# Altium PCB V1.PcbDoc
Units mm, origin at the board's own origin, x right, y up, seen from the top; angles counter-clockwise.
Board outline 25.93 x 33.8 mm, 2 copper layers (Top Layer, Bottom Layer); 9 components, 8 nets, 33 pads, 9 vias.
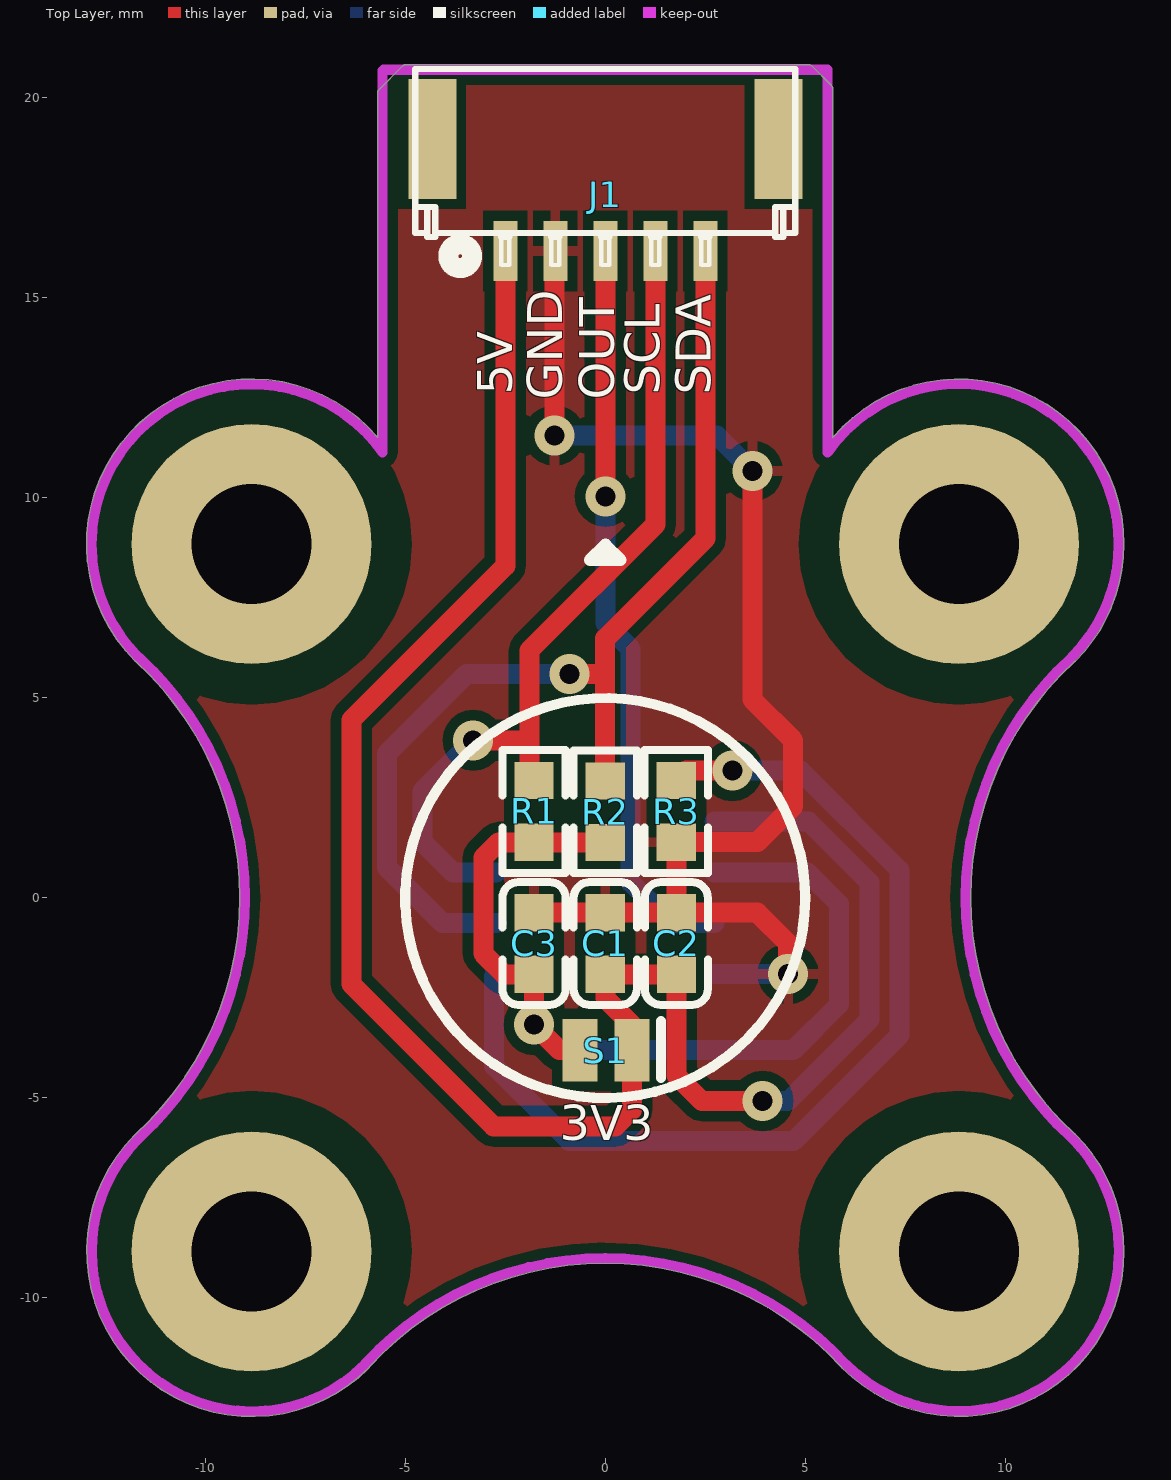
[diagram p0: Top Layer view]
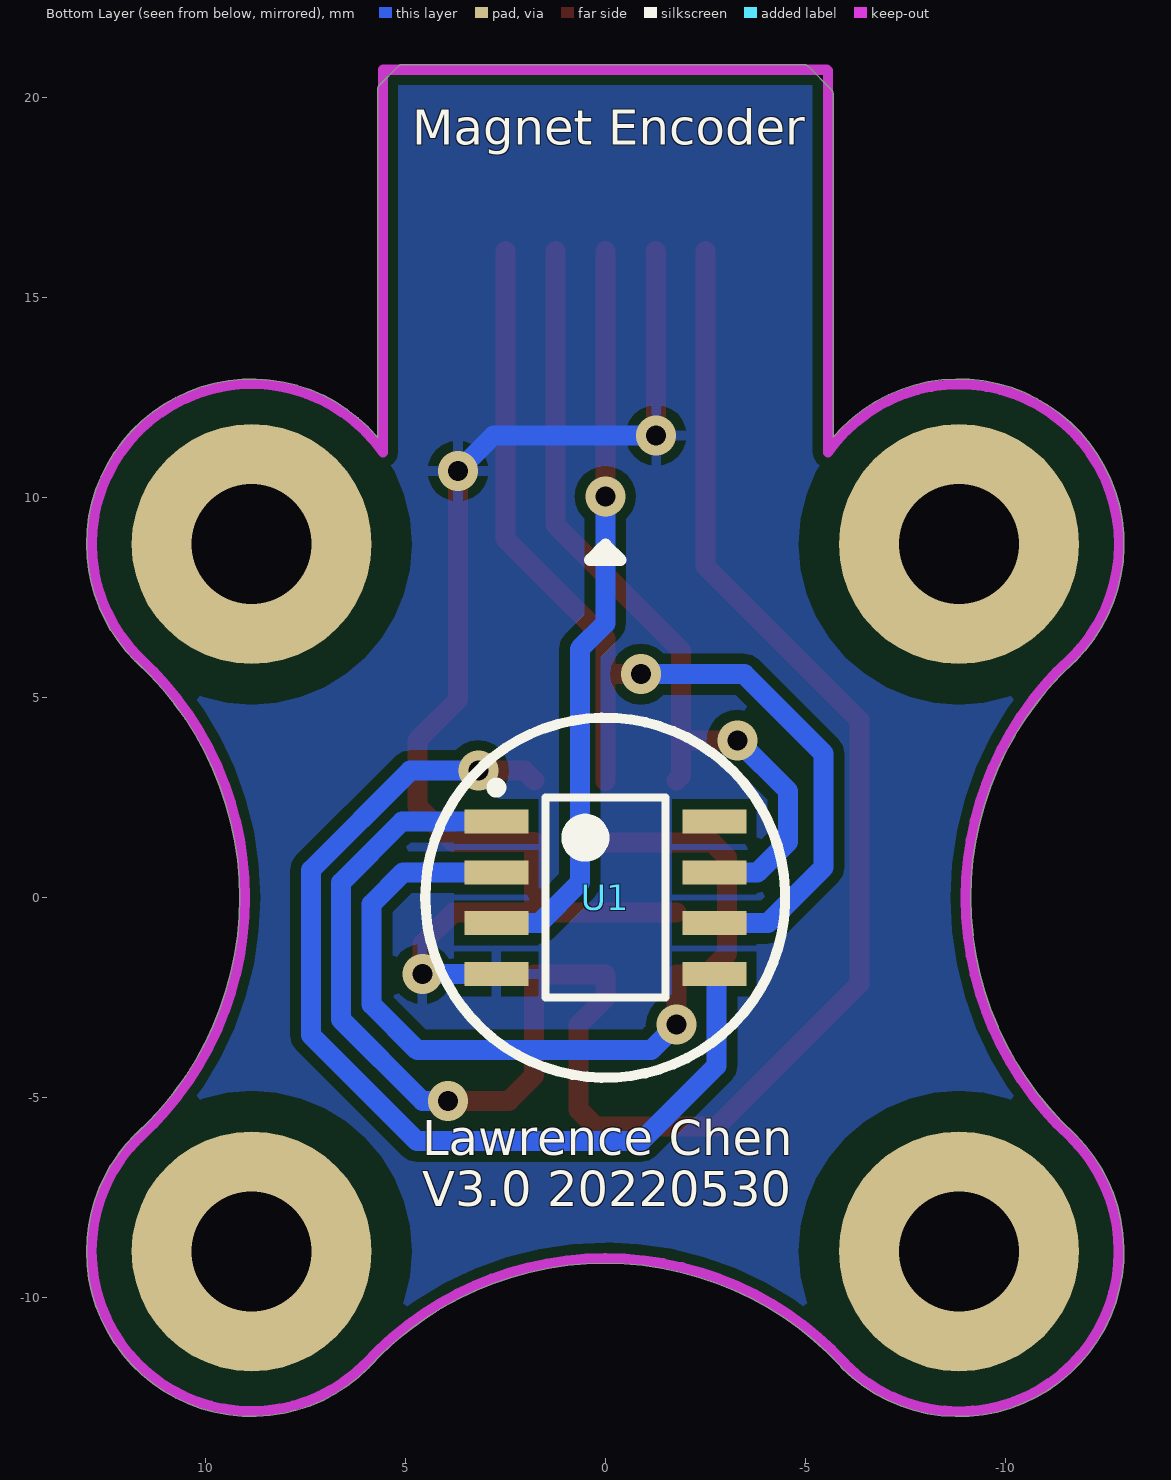
[diagram p1: Bottom Layer view, seen from below]
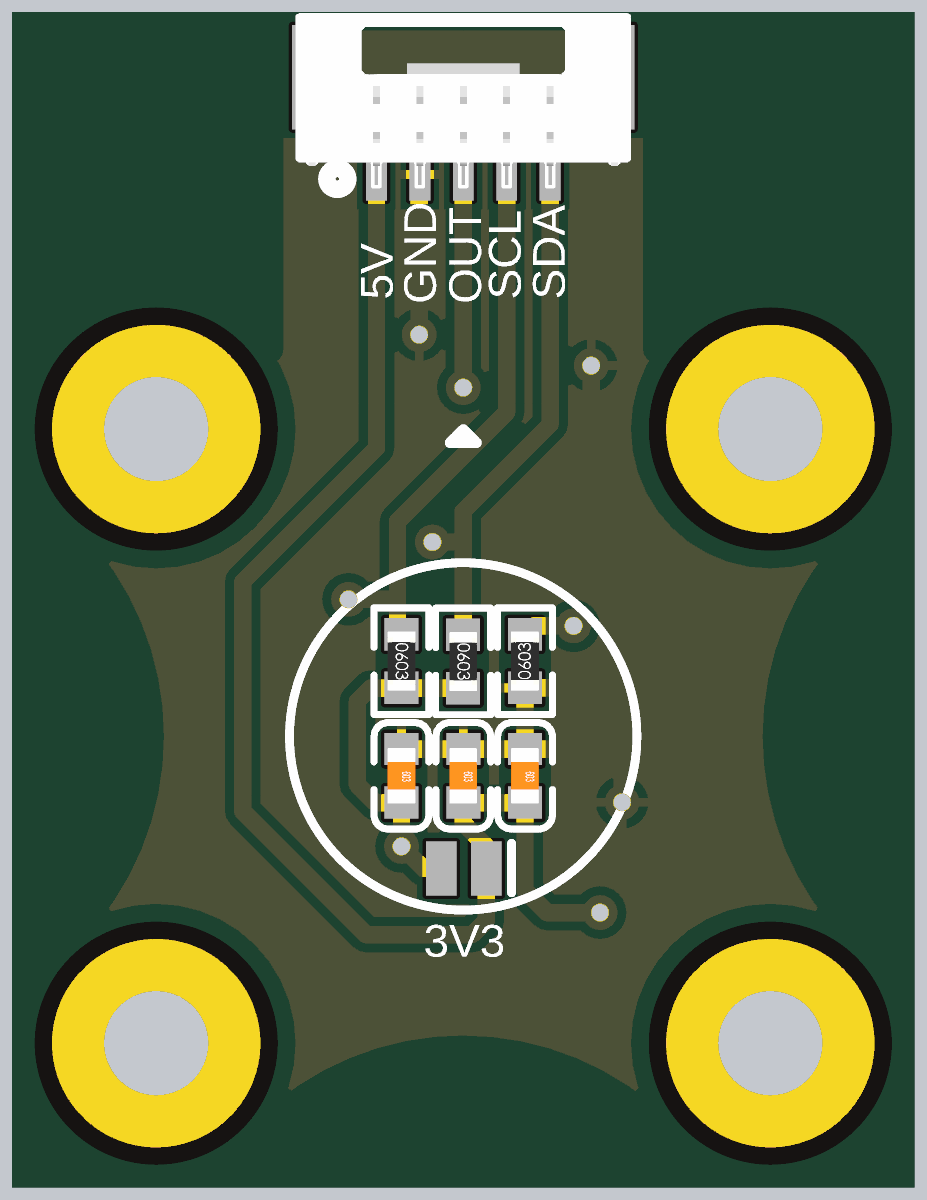
[diagram p2: 3D render of the assembled board from above, using the file's embedded part models]

## Layer stack, top to bottom
Top Solder: solder mask 0.0102, Solder Resist, Dk 3.5
Top Layer: signal copper 0.0356
Dielectric 1: dielectric 0.32, FR-4, Dk 4.8
Bottom Layer: signal copper 0.0356
Bottom Solder: solder mask 0.0102, Solder Resist, Dk 3.5

## Board outline
-11.755,-5.924 cw(c-11.665,-6.014) -11.75,-5.919 ccw(c-17.145,0) -9.136,0 ccw(c-17.145,0) -11.728,5.899 cw(c-11.668,6.012) -11.758,5.922 cw(c-8.84,8.84) -5.693,11.51 -5.693,20.111 cw(c-5.565,20.111) -5.655,20.202 -5.655,20.201 -5.066,20.791 cw(c-4.976,20.701) -4.976,20.828 5.08,20.828 cw(c5.08,20.701) 5.171,20.791 5.17,20.791 5.65,20.311 cw(c5.56,20.221) 5.688,20.221 5.688,11.504 cw(c8.84,8.84) 12.967,8.84 cw(c8.84,8.84) 11.758,5.922 cw(c11.668,6.012) 11.728,5.899 ccw(c17.145,0) 9.136,0 ccw(c17.145,0) 11.728,-5.899 cw(c11.668,-6.012) 11.758,-5.922 cw(c8.84,-8.84) 12.967,-8.84 cw(c8.84,-8.84) 5.922,-11.758 cw(c6.012,-11.668) 5.899,-11.728 ccw(c0,-17.145) 0,-9.136 ccw(c0,-17.145) -5.89,-11.719 cw(c-6.008,-11.671) -5.918,-11.761 cw(c-8.837,-8.842)

## Design rules (kind name [scope] priority, off if disabled: settings)
Clearance [All] p1: gap=0.254 ignorepadtopadclearanceinfootprint=FALSE except(1: THPad-Fill THPad-Poly THPad-Region)
PlaneClearance [All] p1: clearance=1
PolygonConnect [All] p1: connectstyle=Relief reliefconductorwidth=0.254 reliefentries=4 polygonreliefangle="90 Angle" airgapwidth=0.254
RoutingVias [All] p1: holewidth=0.5 width=1 viastyle="Through Hole" minholewidth=0.3 minwidth=0.5 maxholewidth=3 maxwidth=5
SolderMaskExpansion [All] p1: expansion=0.102
Width [All] p1: maxlimit=5 minlimit=0.254 preferedwidth=1
29 further rules are at their usual default settings.

## Components (designator, comment, footprint, x,y, rotation, side; value= is the part's Value field where it differs from the comment)
C1 "1uF (105) 10% 50V" 0603_C 0,-1.143 r270 top
C2 "10uF (106) 10% 10V" 0603_C 1.778,-1.143 r270 top
C3 "1uF (105) 10% 50V" 0603_C -1.78,-1.143 r270 top
J1 "ports_5" GH1.25-LS-5P 0,18.669 r180 top
R1 "10KΩ (1002) ±1%" 0603_R -1.78,2.159 r270 top
R2 "10KΩ (1002) ±1%" 0603_R -0.002,2.151 r270 top
R3 "1KΩ (1001) ±1%" 0603_R 1.776,2.159 r90 top
S1 "SHORT-2PIN" SHORT-2PIN 0.665,-3.81 r180 top
U1 "AS5600" SOIC127P600X175-8N 0,0 r180 bottom locked

## Footprints (in the part's own frame and the unit in brackets; to place one, negate y for a bottom-side part, rotate by r counter-clockwise, add the part's x,y. Pads: shape width x height; smd on the part's side, far side on the other; paste and mask are expansions set on the pad)
0603_C [mm]
  rect 0.93x0.98 smd: 1(-0.77,0) 2(0.77,0)
  silkscreen extent -1.53,-0.79 1.54,0.79, body extent -0.8,-0.4 0.8,0.4, height 0.3
0603_R [mm]
  rect 0.93x0.98 smd: 1(-0.77,0) 2(0.77,0)
  silkscreen extent -1.53,-0.79 1.54,0.79, body extent -0.85,-0.4 0.85,0.4, height 0.56
GH1.25-LS-5P [mm] "A1257WR-S-5P"
  rect 1.2x3 smd: 0(-4.325,-0.3) 0(4.325,-0.3)
  rect 0.6x1.5 smd: 1(2.5,2.5) 2(1.25,2.5) 3(0,2.5) 4(-1.25,2.5) 5(-2.5,2.5)
  silkscreen extent -4.75,-2.05 4.75,2.93, body extent -4.75,-2.15 4.75,2.25, height 4.2
SHORT-2PIN [mm]
  rect 0.88x1.56 smd: 1(0,0) 2(1.3,0)
  silkscreen extent -0.72,-0.72 -0.72,0.7
SOIC127P600X175-8N [mm] "SOIC, 8-Leads, Body 5.0x4.0mm (max), Pitch 1.27mm, IPC Medium Density"
  rect 1.6x0.6 smd: 1(-2.725,1.905) 2(-2.725,0.635) 3(-2.725,-0.635) 4(-2.725,-1.905) 5(2.725,-1.905) 6(2.725,-0.635) 7(2.725,0.635) 8(2.725,1.905)
  silkscreen extent -2.85,-2.5 1.5,2.88, body extent -2,-2.5 2,2.5, height 1.75

## Part data
C1 C3: library part "0603 1uF (105) 10% 50V", "贴片电容", Package=0603, SuppliersPartNumber=C15849, ComponentLink1Description=供应商, ComponentLink1URL=http://www.szlcsc.com/product/details_16531.html, Supplier=LC
C2: library part "0603 10uF (106) 10% 10V", "贴片电容", Package=0603, SuppliersPartNumber=C19702, ComponentLink1Description=供应商, ComponentLink1URL=http://www.szlcsc.com/product/details_20411.html, Supplier=LC
R1 R2: library part "0603 10KΩ (1002) 1%", "贴片电阻", Package=0603, SuppliersPartNumber=C25804, ComponentLink1Description=供应商, ComponentLink1URL=http://www.szlcsc.com/product/details_26547.html, Supplier=LC
R3: library part "0603 1KΩ (1001) 1%", "贴片电阻", Package=0603, SuppliersPartNumber=C21190, ComponentLink1Description=供应商, ComponentLink1URL=http://www.szlcsc.com/product/details_21904.html, Supplier=LC
U1: "Magnet Encoder"

## Free pads (board coordinates)
  round 6 hole 3 unplated mask+0.5: 0(-8.84,-8.84) 0(-8.84,8.84) 0(8.84,-8.84) 0(8.84,8.84)

## Via types
v1: diameter 1, hole 0.5, Top Layer to Bottom Layer, tented both sides, 9 vias

## Nets (pads, with @x,y where several pads share a name; then routed paths per layer and width w, separated by ;. In a path a pad name is that pad's centre, name@x,y a point inside that pad or via, vN(x,y) a via of type N, cw(c..) or ccw(c..) an arc to the next point about the centre after c; other vN are vias at no path point)
DIR: U1.8
GND: C1.1 C2.1 C3.1 J1.2 R3.1 U1.4 | length 33.1
  Top Layer w0.5: C3.1 C1.1 C2.1 ; v1(-1.27,11.557) -1.27,16.149 J1.2 ; v1(3.683,10.668) 3.683,4.953 4.699,3.937 4.699,2.286 3.802,1.389 R3.1 1.778,1.387 C2.1 ; v1(4.572,-1.905) 4.572,-1.143 3.802,-0.373 C2.1
  Bottom Layer w0.5: v1(-1.27,11.557) 2.794,11.557 v1(3.683,10.668) ; U1.4 v1(4.572,-1.905)
OUT: J1.3 U1.3 | length 18.6
  Top Layer w0.5: v1(0,10.033) J1.3
  Bottom Layer w0.5: v1(0,10.033) 0,6.858 0.635,6.223 0.635,0.381 1.651,-0.635 U1.3
PGO: R3.2 U1.5 | length 25.2
  Top Layer w0.5: R3.2 2.022,3.175 v1(3.175,3.175)
  Bottom Layer w0.5: U1.5 -2.782,-1.962 -2.782,-4.203 -0.901,-6.084 4.711,-6.084 7.358,-3.437 7.358,0.693 4.876,3.175 v1(3.175,3.175)
SCL: J1.4 R1.1 U1.7 | length 21.2
  Top Layer w0.5: v1(-3.302,3.937) -1.893,3.937 ; R1.1 -1.893,3.042 -1.893,3.937 ; J1.4 1.25,9.328 -1.893,6.185 -1.893,3.937
  Bottom Layer w0.5: v1(-3.302,3.937) -4.572,2.667 -4.572,1.397 -3.81,0.635 U1.7
SDA: J1.5 R2.1 U1.6 | length 26.7
  Top Layer w0.5: v1(-0.889,5.588) -0.002,5.588 ; R2.1 -0.002,5.588 ; J1.5 2.5,8.977 -0.002,6.475 -0.002,5.588
  Bottom Layer w0.5: U1.6 -4.064,-0.635 -5.461,0.762 -5.461,3.601 -3.474,5.588 v1(-0.889,5.588)
VCC5: C1.2 C2.2 J1.1 S1.1 U1.1 | length 50.4
  Top Layer w0.5: J1.1 -2.5,8.295 -6.35,4.445 -6.35,-2.159 -2.794,-5.715 0.254,-5.715 0.665,-5.304 S1.1 0.665,-3.177 0,-2.512 C1.2 C2.2 1.778,-4.445 2.413,-5.08 v1(3.937,-5.08)
  Bottom Layer w0.5: U1.1 5.08,1.905 6.604,0.381 6.604,-3.048 4.572,-5.08 v1(3.937,-5.08)
VDD3: C3.2 R1.2 R2.2 S1.2 U1.2 | length 24.1
  Top Layer w0.5: v1@-1.78,-3.175 C3.2 -2.532,-1.913 -3.048,-1.397 -3.048,1.008 -2.675,1.381 R2.2 ; v1(-1.778,-3.175) -1.145,-3.81 S1.2
  Bottom Layer w0.5: v1(-1.778,-3.175) -1.143,-3.81 4.699,-3.81 5.842,-2.667 5.842,-0.155 5.052,0.635 U1.2
pads on no net: J1.0

## Polygon pours and split planes (outlines as drawn)
GND on Top Layer "Top Layer-GND" (solid, remove dead copper, pour order 0): -17.018,21.59 17.653,21.59 17.653,-16.51 -17.018,-16.51
GND on Bottom Layer (solid, remove dead copper, pour order 4): 18.161,22.098 18.034,21.971 -19.431,21.971 -19.431,-18.161 -19.177,-17.907 18.796,-17.907

## Keep-outs
Keep-Out Layer:
  lines w0.254: -11.67,6.009 cw(c-8.842,8.837) -5.565,11.131 -5.565,20.679 -5.543,20.701 5.56,20.701 5.56,11.136 cw(c8.837,8.842) 11.665,6.014 ccw(c17.145,0) 9.009,0 ccw(c17.145,0) 11.665,-6.014 ; -11.665,6.014 cw(c-17.145,0) -9.009,0 cw(c-17.145,0) -11.665,-6.014 ccw(c-8.837,-8.842) -6.009,-11.67 ; -6.014,-11.665 cw(c0,-17.145) 0,-9.009 ; -0.002,-9.012 cw(c-0.002,-17.148) 6.012,-11.668 ; 6.014,-11.665 ccw(c8.842,-8.837) 11.67,-6.009

## Other copper
Top Layer:
  pour cut-out: -9.906,3.81
  pour cut-out: -8.842,8.837

## Silkscreen, mask and mechanical layers (free items; w line width, h text height)
Top Overlay:
  circle w0.254: c-0.002,-0.008 r5
  lines w0.152: -0.191,8.636 0.191,8.636
  lines w0.3: -0.381,8.445 0.381,8.445 0,8.826 -0.381,8.445
  text "5V" at -2.032,12.573 h1.5 r90
  text "SCL" at 1.651,12.573 h1.5 r90
  text "SDA" at 2.921,12.573 h1.5 r90
  text "GND" at -0.79,12.446 h1.5 r90
  text "OUT" at 0.508,12.446 h1.5 r90
  text "3V3" at -1.143,-6.35 h1.5
Bottom Overlay:
  circle w0.254: c0,0 r4.5
  lines w0.152: -0.191,8.636 0.191,8.636
  lines w0.3: -0.381,8.445 0,8.826 0.095,8.731 0.286,8.541 0.381,8.445 -0.381,8.445
  text "Magnet Encoder" at 4.826,18.542 h1.5
  text "Lawrence Chen" at 4.572,-6.731 h1.5
  text "V3.0 20220530" at 4.572,-8.001 h1.5
Mechanical 1:
  lines w0.254: -11.668,6.012 cw(c-8.84,8.84) -5.563,11.133 ; -11.665,6.014 cw(c-17.145,0) -9.009,0 cw(c-17.145,0) -11.665,-6.014 ccw(c-8.837,-8.842) -6.008,-11.671 ; -6.014,-11.665 cw(c0,-17.145) 0,-9.009 cw(c0,-17.145) 6.014,-11.665 ; -5.565,11.131 -5.565,20.111 -4.976,20.701 5.08,20.701 5.56,20.221 5.56,11.176 ; 5.563,11.134 cw(c8.84,8.84) 11.668,6.012 ; 6.012,-11.668 ccw(c8.84,-8.84) 11.668,-6.012 ; 11.665,-6.014 cw(c17.145,0) 9.009,0 cw(c17.145,0) 11.665,6.014
Mechanical 15:
  circle w0.254: c0,0 r15
  circle w0.254: c0,0 r9
  circle w0.254: c0,0 r3
  lines w0.152: -21.59,-1.397 0,-1.397 0,18.161 ; 0,-18.288 0,0 21.844,0